# Altium PCB P-TK-05-2FC-A-MB(V1.1)-20171225.PcbDoc (part 3 of 3)
Units mm, origin at the board's own origin, x right, y up, seen from the top; angles counter-clockwise.
Board outline 82.48 x 84.99 mm, 2 copper layers (Top Layer, Bottom Layer); 89 components, 88 nets, 340 pads, 147 vias.
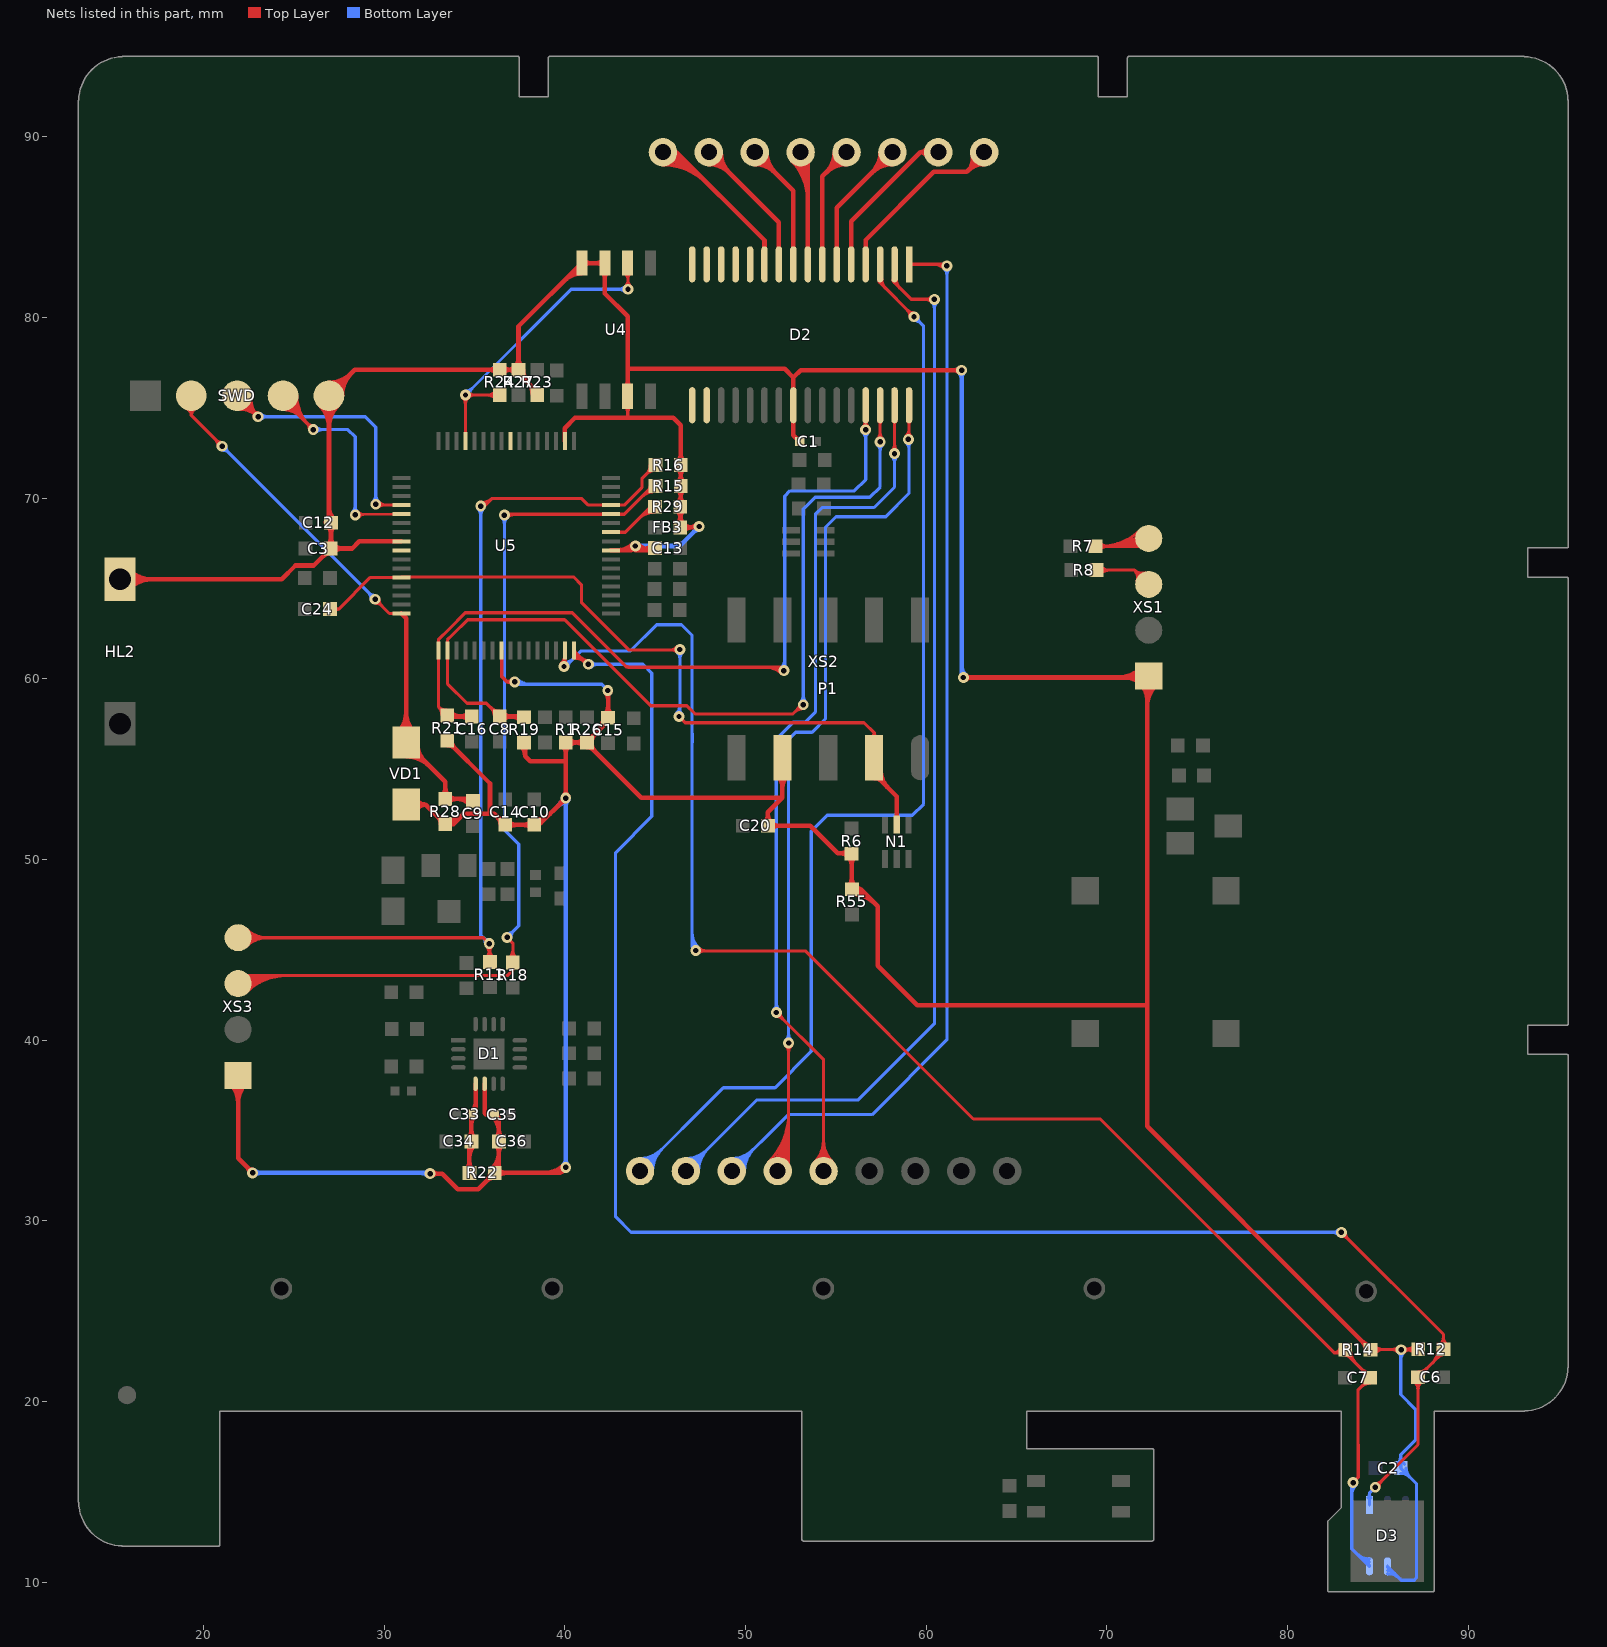
[diagram p3: the nets of this part, all layers, seen from the top]

## Via types
v1: diameter 0.6, hole 0.3, Top Layer to Bottom Layer, tented both sides, 146 vias
v2: diameter 0.5, hole 0.3, Top Layer to Bottom Layer, tented both sides, 1 vias

## Nets (pads, with @x,y where several pads share a name; then routed paths per layer and width w, separated by ;. In a path a pad name is that pad's centre, name@x,y a point inside that pad or via, vN(x,y) a via of type N, cw(c..) or ccw(c..) an arc to the next point about the centre after c; other vN are vias at no path point) (continued)
PLCTXD: C24.1 N1.5 P1.3 U5.60 | length 48.4
  Top Layer w0.178: C24.1@27,63.856 27.486,63.856 ; C24.1@27.258,63.719 cw(c27.486,63.598) 27.486,63.856 ; C24.1@27.258,63.992 ccw(c27.486,64.113) 27.486,63.856 ; U5.60@30.954,65.611 29.241,65.611 27.486,63.856 ; U5.60@30.954,65.631 40.499,65.631 40.923,65.207 40.923,64.225 43.559,61.59 46.34,61.59 v1(46.37,61.62) ; 45.788,61.59 ccw(c45.788,62.202) v1@46.221,61.769 ; 45.932,61.59 cw(c45.932,61.182) v1@46.221,61.471 ; v1(46.32,57.91) 46.66,57.57 56.56,57.57 57.123,57.007 ; P1.3@56.961,56.761 ccw(c56.855,57.007) 57.123,57.007 ; P1.3@57.123,55.633 57.123,57.007 ; P1.3@57.285,56.761 cw(c57.391,57.007) 57.123,57.007
  Top Layer w0.254: P1.3@57.123,54.51 cw(c57.123,53.963) 57.51,54.35 ; P1.3@57.123,55.633 57.123,54.737 58.378,53.482 N1.5@58.378,51.929 ; P1.3@57.242,54.883 ccw(c57.882,54.883) P1.3@57.43,54.43 ; P1.3@57.496,54.883 ccw(c58.75,54.883) 57.863,53.997
  Bottom Layer w0.178: v1@46.171,58.059 ccw(c45.69,58.54) 46.37,58.54 ; v1@46.221,61.471 cw(c45.86,61.11) 46.37,61.11 cw(c46.88,61.11) v1@46.519,61.471 ; v1(46.32,57.91) 46.37,57.96 v1(46.37,61.62) ; 46.37,58.299 ccw(c46.709,58.299) v1@46.469,58.059
RESET: C9.2 R28.2 SWD.2 U5.64 VD1.A | length 44.3
  Top Layer w0.178: SWD.2@19.066,74.953 cw(c18.926,74.574) 19.329,74.574 ; SWD.2@19.329,75.667 19.329,74.574 ; SWD.2@19.593,74.953 ccw(c19.733,74.574) 19.329,74.574 ; v1@20.822,72.871 ccw(c20.312,72.871) 20.672,73.231 ccw(c21.033,73.592) v1@21.033,73.082 ; v1(21.033,72.871) 19.329,74.574 ; v1@29.5,64.192 cw(c29.5,63.682) 29.861,64.043 cw(c30.221,64.403) v1@29.711,64.403 ; v1(29.5,64.403) 30.293,63.611 U5.64@30.954,63.611 ; C9.2@34.802,53.353 34.918,53.353 C9.2@34.918,53.236
  Top Layer w0.254: VD1.A@30.768,57.04 ccw(c29.684,58.124) 31.217,58.124 ccw(c32.75,58.124) VD1.A@31.666,57.04 ; VD1.A@30.947,56.861 ccw(c30.297,57.511) 31.217,57.511 ccw(c32.136,57.511) VD1.A@31.486,56.861 ; U5.64@30.954,63.611 31.217,63.348 VD1.A@31.217,56.464 33.391,54.29 R28.2@33.391,53.353 C9.2@34.802,53.353 ; VD1.A@31.217,55.702 cw(c31.217,53.863) 32.517,55.163 ; VD1.A@31.217,55.956 cw(c31.217,54.73) 32.084,55.597 ; VD1.A@31.852,56.337 ccw(c33.078,56.337) 32.211,55.47 ; R28.2@33.211,53.532 ccw(c32.778,53.966) 33.391,53.966 ccw(c34.004,53.966) 33.57,53.532 ccw(c34.004,53.966) 34.004,53.353 ccw(c34.004,52.74) R28.2@33.57,53.173 ; 34.024,53.353 cw(c34.024,52.343) C9.2@34.739,53.057
  Bottom Layer w0.178: v1@21.033,72.66 cw(c21.033,72.15) 21.393,72.51 cw(c21.753,72.871) v1@21.244,72.871 ; v1(21.033,72.871) v1(29.5,64.403) ; v1@29.289,64.403 ccw(c28.78,64.403) 29.14,64.764 ccw(c29.5,65.124) v1@29.5,64.614
SCK: R24.2 U4.6 U5.45 | length 23.3
  Top Layer w0.178: v1@34.355,75.555 cw(c33.994,75.195) 34.504,75.195 cw(c35.013,75.195) 34.653,75.555 cw(c35.013,75.195) 35.013,75.705 cw(c35.013,76.214) v1@34.653,75.854 ; U5.45@34.504,73.161 v1(34.504,75.705) R24.2@36.398,75.705 R24.2@36.398,75.818 ; R24.2@36.192,75.498 ccw(c35.693,75) 35.693,75.705 ccw(c35.693,76.41) R24.2@36.192,75.911 ; U4.6@43.332,82.461 cw(c42.927,82.056) 43.5,82.056 ; v1@43.351,81.709 ccw(c42.99,82.07) 43.5,82.07 ccw(c44.01,82.07) v1@43.649,81.709 ; v1(43.5,81.56) U4.6@43.5,82.992 ; 43.5,82.129 cw(c43.969,82.129) U4.6@43.637,82.461
  Bottom Layer w0.178: v1(34.504,75.705) 40.359,81.56 v1(43.5,81.56) ; v1@34.504,75.916 ccw(c34.504,76.425) 34.864,76.065 ccw(c35.225,75.705) v1@34.715,75.705 ; v1@43.351,81.411 ccw(c42.99,81.05) 42.99,81.56 ccw(c42.99,82.07) v1@43.351,81.709
SCL1: C16.2 D2.29 R21.2 U5.1 | length 52.7
  Top Layer w0.178: R21.2@33.199,57.976 ccw(c32.532,57.987) 33.004,58.459 ; R21.2@33.486,58.263 cw(c33.476,58.93) 33.004,58.459 ; R21.2@33.55,57.912 R21.2@33.491,57.971 33.004,58.459 ; 51.172,60.636 cw(c51.172,59.492) v1@51.981,60.301 ; 51.601,60.636 cw(c51.601,59.921) v1@52.106,60.426 ; v1@52.11,60.47 51.944,60.636 44.416,60.636 44.415,60.637 43.945,60.637 43.944,60.636 43.507,60.636 43.483,60.66 43.4,60.66 40.41,63.65 34.49,63.65 33.595,62.755 33.004,62.164 U5.1@33.004,61.561 33.004,58.459 ; v1@56.504,73.933 ccw(c56.144,74.293) 56.653,74.293 ccw(c57.163,74.293) v1@56.803,73.933 ; D2.29@56.589,74.254 cw(c56.433,74.098) 56.653,74.098 cw(c56.873,74.098) D2.29@56.718,74.254 ; v1(56.653,73.783) D2.29@56.653,75.138
  Top Layer w0.254: R21.2@33.55,57.912 C16.2@34.849,57.912 ; R21.2@33.671,57.792 cw(c33.962,57.501) 33.962,57.912 ; R21.2@33.671,58.151 ccw(c34.247,58.727) 34.247,57.912 ; C16.2@34.669,57.732 ccw(c34.236,57.299) 34.236,57.912 ccw(c34.236,58.525) C16.2@34.669,58.092
  Bottom Layer w0.178: v1@51.981,60.599 ccw(c51.524,61.056) 52.17,61.056 ; v1(52.13,60.45) 52.17,60.49 52.17,70.11 52.46,70.4 56.03,70.4 56.653,71.023 v1(56.653,73.783) ; 52.17,60.863 ccw(c52.543,60.863) v1@52.279,60.599 ; v1@56.504,73.634 cw(c56.144,73.274) 56.653,73.274 cw(c57.163,73.274) v1@56.803,73.634
SCL2: C7.1 D3.6 R14.1 U5.15 | length 96.1
  Top Layer w0.178: v1@39.806,60.83 ccw(c39.33,61.306) U5.15@40.004,61.306 ; v1(39.956,60.68) 40.004,60.728 U5.15@40.004,61.561 ; U5.15@40.004,61.074 ccw(c40.349,61.074) v1@40.105,60.83 ; v1(47.25,44.96) 47.27,44.94 53.31,44.94 62.614,35.636 69.643,35.636 82.584,22.695 ; v1@47.399,44.811 cw(c47.711,44.499) 47.711,44.94 ; v1@47.399,45.109 ccw(c47.808,45.518) 47.808,44.94 ; R14.1@82.823,22.695 ccw(c82.823,22.972) R14.1@83.088,22.893 ; R14.1@82.918,22.943 cw(c82.584,23.043) 82.584,22.695 ; R14.1@83.198,22.568 cw(c83.198,22.261) 83.415,22.478 ; R14.1@83.198,22.86 R14.1@83.198,22.695 ; R14.1@83.312,22.86 ccw(c83.986,22.86) 83.509,22.383 ; R14.1@83.49,22.86 ccw(c84.593,22.86) 83.813,22.08 ; v1@83.562,15.462 v1(83.63,15.51) 83.92,15.8 83.92,17.615 83.895,17.64 83.895,20.623 C7.1@84.582,21.311 R14.1@83.198,22.695 ; C7.1@84.582,21.018 ccw(c84.582,20.313) 84.083,20.812 ccw(c83.585,21.311) 84.29,21.311 ccw(c83.585,21.311) 84.083,21.809 ccw(c84.582,22.308) C7.1@84.582,21.603 ; 82.584,22.695 R14.1@83.198,22.695
  Bottom Layer w0.178: v1(39.956,60.68) 40.079,60.68 40.227,60.828 40.227,60.864 40.903,61.54 43.64,61.54 45.09,62.99 46.46,62.99 47.042,62.408 47.042,56.961 47.05,56.953 47.05,56.483 47.047,56.48 47.047,56.405 47.042,56.401 47.042,45.168 v1(47.25,44.96) ; v1@39.956,60.891 ccw(c39.956,61.613) 40.466,61.103 ; v1@40.167,60.68 cw(c40.465,60.68) 40.254,60.891 ; 47.042,45.542 ccw(c47.832,45.542) v1@47.274,44.984 ; 47.042,45.971 ccw(c48.261,45.971) v1@47.399,45.109 ; v1@83.481,15.361 cw(c83.285,15.165) 83.562,15.165 ; 83.562,14.836 cw(c84.304,14.836) v1@83.779,15.361 ; v1@83.562,15.462 83.562,11.85 D3.6@84.534,10.878 ; 83.832,11.579 ccw(c84.534,12.281) D3.6@84.534,11.289 ; 84.136,11.276 ccw(c84.534,11.674) D3.6@84.534,11.111 ; D3.6@84.439,10.972 ccw(c84.534,11.067) D3.6@84.534,10.933
SCL3: R11.2 R16.2 U5.29 XS3.4 | length 60.7
  Top Layer w0.178: XS3.4@21.922,45.67 35.49,45.67 v1(35.82,45.34) 35.82,44.357 R11.2@35.858,44.319 ; XS3.4@22.263,45.328 cw(c23.089,44.503) 23.089,45.67 cw(c23.089,46.837) XS3.4@22.263,46.012 ; XS3.4@22.389,45.203 cw(c23.518,44.074) 23.518,45.67 cw(c23.518,47.266) XS3.4@22.389,46.137 ; v1@35.35,69.61 v1(35.35,69.56) 35.552,69.56 35.962,69.97 ; v1@35.354,69.593 ccw(c35.407,70.012) 35.705,69.713 ; v1@35.376,69.769 ccw(c35.464,70.468) 35.962,69.97 ; R11.2@35.652,44.525 ccw(c35.246,44.931) 35.82,44.931 ; v1@35.671,45.191 cw(c35.31,44.83) 35.82,44.83 cw(c36.33,44.83) v1@35.969,45.191 ; v1@35.82,45.117 ccw(c36.656,45.117) R11.2@36.065,44.525 ; R16.2@44.729,71.831 cw(c44.024,71.831) 44.523,71.333 cw(c45.022,70.834) R16.2@45.022,71.539 ; R16.2@45.022,71.831 44.27,71.08 44.27,70.583 43.298,69.611 U5.29@42.554,69.611 41.309,69.611 40.95,69.97 35.962,69.97
  Bottom Layer w0.178: v1@35.201,69.411 cw(c34.84,69.05) 35.35,69.05 cw(c35.86,69.05) v1@35.499,69.411 ; v1(35.35,69.56) 35.35,45.81 v1(35.82,45.34) ; v1@35.609,45.34 ccw(c35.099,45.34) 35.46,45.7 ccw(c35.82,46.061) v1@35.82,45.551
SDA1: C8.2 D2.30 R19.2 U5.2 | length 56.6
  Top Layer w0.178: C8.2@36.106,57.912 ccw(c35.401,57.912) 35.9,58.411 ccw(c36.398,58.909) C8.2@36.398,58.204 ; C8.2@36.398,57.912 35.66,58.65 34.59,58.65 33.504,59.736 U5.2@33.504,61.561 33.504,62.15 33.804,62.45 34.624,63.27 39.99,63.27 44.751,58.509 46.761,58.509 47.22,58.05 52.617,58.05 v1@53.127,58.56 ; 52.714,58.148 cw(c53.2,57.662) v1@53.2,58.349 ; 52.892,58.325 ccw(c52.657,58.56) v1@52.989,58.56 ; v1@57.304,73.263 ccw(c56.944,73.623) 57.453,73.623 ccw(c57.963,73.623) v1@57.603,73.263 ; D2.30@57.389,74.254 cw(c57.233,74.098) 57.453,74.098 cw(c57.673,74.098) D2.30@57.518,74.254 ; v1(57.453,73.113) D2.30@57.453,75.138
  Top Layer w0.254: C8.2@36.398,57.912 37.706,57.912 R19.2@37.744,57.874 ; C8.2@36.578,57.732 cw(c37.011,57.299) 37.011,57.912 cw(c37.011,58.525) C8.2@36.578,58.092 ; 37.039,57.912 cw(c37.039,57.169) R19.2@37.565,57.694 ; 37.223,57.912 ccw(c37.223,58.395) R19.2@37.565,58.054
  Bottom Layer w0.178: v1@53.051,58.709 ccw(c52.69,59.07) 53.2,59.07 ccw(c53.71,59.07) v1@53.349,58.709 ; v1(53.2,58.56) 53.2,69.38 53.864,70.044 56.888,70.044 57.453,70.61 v1(57.453,73.113) ; v1@57.304,72.964 cw(c56.944,72.604) 57.453,72.604 cw(c57.963,72.604) v1@57.603,72.964
SDA2: C6.2 D3.1 R12.1 U5.16 | length 106.1
  Top Layer w0.178: U5.16@40.504,61.15 cw(c40.504,60.157) v1@41.206,60.859 ; U5.16@40.504,61.328 cw(c40.504,60.764) 40.902,61.163 ; U5.16@40.504,61.505 cw(c40.504,61.371) U5.16@40.599,61.466 ; U5.16@40.504,61.561 41.265,60.8 v1(41.31,60.8) ; 40.872,61.192 ccw(c41.31,61.63) v1@41.31,61.011 ; 40.982,61.083 cw(c40.699,60.8) v1@41.099,60.8 ; v1@82.983,29.151 cw(c82.983,28.641) 83.344,29.002 cw(c83.704,29.362) v1@83.194,29.362 ; v1(82.983,29.362) 88.633,23.712 R12.1@88.633,22.885 88.633,22.746 C6.2@87.224,21.336 87.224,17.614 v1(84.86,15.25) ; v1@84.86,15.461 ccw(c84.86,15.971) 85.22,15.61 ccw(c85.581,15.25) v1@85.071,15.25 ; C6.2@87.017,21.129 cw(c86.518,20.631) 87.224,20.631 cw(c87.929,20.631) C6.2@87.43,21.129 ; C6.2@87.224,21.628 ccw(c87.224,22.333) 87.722,21.835 ccw(c88.221,21.336) C6.2@87.516,21.336 ; 88.036,22.148 ccw(c87.299,22.885) R12.1@88.341,22.885 ; 88.339,22.452 ccw(c87.906,22.885) R12.1@88.519,22.885 ; 88.373,22.485 cw(c88.633,22.225) R12.1@88.633,22.593 ; R12.1@88.427,23.092 ccw(c87.928,23.591) 88.633,23.591 ccw(c89.339,23.591) R12.1@88.84,23.092
  Bottom Layer w0.178: v1(41.31,60.8) 44.33,60.8 44.813,60.317 44.813,52.38 42.81,50.377 42.81,30.216 43.664,29.362 v1(82.983,29.362) ; v1@41.459,60.651 cw(c41.82,60.29) 41.82,60.8 cw(c41.82,61.31) v1@41.459,60.949 ; v1@82.834,29.213 ccw(c82.474,28.853) 82.474,29.362 ccw(c82.474,29.872) v1@82.834,29.511 ; D3.1@84.455,14.66 ccw(c84.266,14.849) 84.534,14.849 ccw(c84.802,14.849) D3.1@84.613,14.66 ; D3.1@84.534,14.281 84.534,14.924 v1(84.86,15.25)
SDA3: R15.2 R18.1 U5.28 XS3.3 | length 64.8
  Top Layer w0.178: XS3.3@21.886,43.165 cw(c22.863,42.189) 22.863,43.57 ; XS3.3@21.922,43.13 22.362,43.57 36.82,43.57 37.127,43.877 ; XS3.3@22.012,43.04 cw(c23.292,41.759) 23.292,43.57 ; XS3.3@22.138,42.914 cw(c23.722,41.33) 23.722,43.57 ; XS3.3@22.263,42.788 cw(c24.151,40.901) 24.151,43.57 ; XS3.3@22.389,42.663 cw(c24.58,40.472) 24.58,43.57 ; v1(36.66,69.06) 36.66,69.081 36.689,69.111 U5.28@42.554,69.111 43.301,69.111 44.853,70.663 R15.2@45.022,70.663 ; v1@36.809,68.911 cw(c37.292,68.427) 37.292,69.111 ; v1@36.809,69.209 ccw(c37.047,69.447) 37.047,69.111 ; v1(36.81,45.69) 37.127,45.373 R18.1@37.127,44.301 37.127,43.877 ; R18.1@36.92,44.507 ccw(c36.422,45.006) 37.127,45.006 ccw(c37.832,45.006) R18.1@37.333,44.507 ; R18.1@37.023,44.028 cw(c36.965,43.877) 37.127,43.877 ; R18.1@37.231,44.028 ccw(c37.288,43.877) 37.127,43.877 ; 44.235,70.045 cw(c45.022,69.258) R15.2@45.022,70.371 ; 44.538,70.348 cw(c45.022,69.865) R15.2@45.022,70.549 ; R15.2@44.642,70.452 ccw(c44.431,70.663) R15.2@44.729,70.663
  Bottom Layer w0.178: v1@36.511,68.911 cw(c36.15,68.55) 36.66,68.55 cw(c37.17,68.55) v1@36.809,68.911 ; v1(36.66,69.06) 36.66,51.635 37.45,50.845 37.45,46.33 v1(36.81,45.69) ; v1@36.81,45.901 ccw(c36.81,46.411) 37.17,46.05 ccw(c37.531,45.69) v1@37.021,45.69
SEG00: D2.31 XS2.5 | length 57.7
  Top Layer w0.178: v1@51.71,41.319 cw(c51.71,40.809) 52.07,41.17 cw(c52.431,41.53) v1@51.921,41.53 ; v1(51.71,41.53) 54.324,38.916 XS2.5@54.324,32.756 ; XS2.5@53.831,33.25 ccw(c52.638,34.442) 54.324,34.442 ccw(c56.011,34.442) XS2.5@54.818,33.25 ; XS2.5@53.956,33.124 ccw(c53.067,34.013) 54.324,34.013 ccw(c55.581,34.013) XS2.5@54.693,33.124 ; XS2.5@54.082,32.999 ccw(c53.497,33.584) 54.324,33.584 ccw(c55.152,33.584) XS2.5@54.567,32.999 ; v1@58.101,72.609 ccw(c57.732,72.978) 58.253,72.978 ; D2.31@58.189,74.254 cw(c58.033,74.098) 58.253,74.098 cw(c58.473,74.098) D2.31@58.318,74.254 ; v1(58.25,72.46) 58.253,72.463 D2.31@58.253,75.138 ; 58.253,72.961 ccw(c58.751,72.961) v1@58.399,72.609
  Bottom Layer w0.178: v1@51.561,41.679 ccw(c51.2,42.04) 51.71,42.04 ccw(c52.22,42.04) v1@51.859,41.679 ; v1(51.71,41.53) 51.71,56.655 52.644,57.589 53.304,57.589 53.87,58.154 53.87,69.11 54.24,69.48 57.12,69.48 58.25,70.61 v1(58.25,72.46) ; v1@58.101,72.311 cw(c57.74,71.95) 58.25,71.95 cw(c58.76,71.95) v1@58.399,72.311
SEG01: D2.32 XS2.6 | length 64.7
  Top Layer w0.178: XS2.6@51.291,33.25 ccw(c48.636,35.904) 52.39,35.904 ; XS2.6@51.416,33.124 ccw(c49.065,35.475) 52.39,35.475 ; XS2.6@51.542,32.999 ccw(c49.495,35.046) 52.39,35.046 ; XS2.6@51.668,32.873 ccw(c49.924,34.617) 52.39,34.617 ; XS2.6@51.784,32.756 52.39,33.362 v1(52.39,39.84) ; XS2.6@51.793,32.747 ccw(c50.353,34.187) 52.39,34.187 ; XS2.6@51.919,32.621 ccw(c50.782,33.758) 52.39,33.758 ; XS2.6@52.045,32.496 ccw(c51.212,33.329) 52.39,33.329 ; v1@52.241,39.691 cw(c51.88,39.33) 52.39,39.33 cw(c52.9,39.33) v1@52.539,39.691 ; v1@58.871,73.399 ccw(c58.429,73.84) 59.053,73.84 ; D2.32@58.989,74.254 cw(c58.833,74.098) 59.053,74.098 cw(c59.273,74.098) D2.32@59.118,74.254 ; v1(59.02,73.25) 59.05,73.25 59.053,73.253 D2.32@59.053,75.138 ; 59.053,73.679 ccw(c59.449,73.679) v1@59.169,73.399
  Bottom Layer w0.178: v1@52.241,39.989 ccw(c51.88,40.35) 52.39,40.35 ccw(c52.9,40.35) v1@52.539,39.989 ; v1(52.39,39.84) 52.39,56.65 52.78,57.04 53.69,57.04 54.43,57.78 54.43,68.39 55.01,68.97 57.76,68.97 59.053,70.263 59.053,73.253 59.05,73.25 v1(59.02,73.25) ; v1@58.871,73.101 cw(c58.429,72.659) 59.053,72.659 ; 59.053,72.821 cw(c59.449,72.821) v1@59.169,73.101
SEG02: D2.1 XS2.7 | length 68
  Top Layer w0.178: D2.1@59.053,82.938 61.062,82.938 v1(61.15,82.85) ; D2.1@59.118,82.874 cw(c59.273,82.718) 59.273,82.938 cw(c59.273,83.158) D2.1@59.118,83.003 ; 60.427,82.938 cw(c60.427,82.127) v1@61.001,82.701 ; 60.854,82.938 ccw(c60.854,83.146) v1@61.001,82.999 ; 60.856,82.938 cw(c60.856,82.556) v1@61.126,82.826
  Bottom Layer w0.178: XS2.7@49.244,32.756 52.368,35.88 57.01,35.88 61.15,40.02 v1(61.15,82.85) ; XS2.7@49.244,33.099 ccw(c49.244,33.927) 49.83,33.341 ccw(c50.415,32.756) XS2.7@49.587,32.756 ; XS2.7@49.244,33.277 ccw(c49.244,34.534) 50.133,33.645 ccw(c51.022,32.756) XS2.7@49.765,32.756 ; XS2.7@49.244,33.455 ccw(c49.244,35.141) 50.437,33.949 ccw(c51.629,32.756) XS2.7@49.943,32.756 ; v1@61.001,82.701 cw(c60.64,82.34) 61.15,82.34 cw(c61.66,82.34) v1@61.299,82.701
SEG03: D2.2 XS2.8 | length 69.7
  Top Layer w0.178: D2.2@58.167,82.118 ccw(c58.444,82.118) 58.248,81.922 ; D2.2@58.253,82.938 58.253,81.917 ; D2.2@58.344,82.118 ccw(c59.051,82.118) 58.552,81.618 ; v1@60.311,80.851 ccw(c59.95,80.49) 59.95,81 ccw(c59.95,81.51) v1@60.311,81.149 ; v1(60.46,81) 59.17,81 58.253,81.917 ; 58.253,81.917 ccw(c58.076,81.917) 58.193,82.05 cw(c58.076,81.917) 58.253,81.917 ; 58.253,81.917 cw(c58.431,81.917) 58.314,82.05 ccw(c58.431,81.917) 58.253,81.917
  Bottom Layer w0.178: XS2.8@46.704,32.756 50.638,36.69 56.24,36.69 60.46,40.91 v1(60.46,81) ; XS2.8@46.704,33.099 ccw(c46.704,33.927) 47.29,33.341 ccw(c47.875,32.756) XS2.8@47.047,32.756 ; XS2.8@46.704,33.277 ccw(c46.704,34.534) 47.593,33.645 ccw(c48.482,32.756) XS2.8@47.225,32.756 ; XS2.8@46.704,33.455 ccw(c46.704,35.141) 47.897,33.949 ccw(c49.089,32.756) XS2.8@47.403,32.756 ; v1@60.311,80.851 cw(c59.95,80.49) 60.46,80.49 cw(c60.97,80.49) v1@60.609,80.851
SEG04: D2.3 XS2.9 | length 71
  Top Layer w0.178: D2.3@57.367,82.118 ccw(c57.644,82.118) 57.448,81.922 ; D2.3@57.453,82.938 57.453,81.917 ; D2.3@57.544,82.118 ccw(c58.251,82.118) 57.752,81.618 ; v1@59.119,80.04 ccw(c58.609,80.04) 58.97,80.4 ccw(c59.33,80.761) v1@59.33,80.251 ; v1(59.33,80.04) 57.453,81.917 ; 57.453,81.917 ccw(c57.276,81.917) 57.393,82.05 cw(c57.276,81.917) 57.453,81.917 ; 57.453,81.917 cw(c57.631,81.917) 57.514,82.05 ccw(c57.631,81.917) 57.453,81.917
  Bottom Layer w0.178: XS2.9@44.164,32.756 48.778,37.37 51.64,37.37 53.645,39.375 53.645,51.566 54.525,52.445 59.24,52.445 59.86,53.065 59.86,79.51 v1(59.33,80.04) ; XS2.9@44.164,33.099 ccw(c44.164,33.927) 44.75,33.341 ccw(c45.335,32.756) XS2.9@44.507,32.756 ; XS2.9@44.164,33.277 ccw(c44.164,34.534) 45.053,33.645 ccw(c45.942,32.756) XS2.9@44.685,32.756 ; XS2.9@44.164,33.455 ccw(c44.164,35.141) 45.357,33.949 ccw(c46.549,32.756) XS2.9@44.863,32.756 ; v1@59.33,79.829 cw(c59.33,79.319) 59.69,79.68 cw(c60.051,80.04) v1@59.541,80.04
SEG05: D2.4 XS2.10 | length 12.6
  Top Layer w0.254: D2.4@56.653,82.938 56.653,84.283 60.422,88.052 62.252,88.052 63.214,89.014 XS2.10@63.214,89.144 ; 62.317,88.117 ccw(c61.647,88.787) XS2.10@62.571,88.997 ; 62.317,88.117 cw(c63.203,87.231) XS2.10@63.21,88.484 ; 62.642,88.442 ccw(c62.176,88.907) XS2.10@62.818,89.054
SEG06: D2.5 XS2.11 | length 9.8
  Top Layer w0.254: D2.5@55.853,82.938 55.853,85.318 59.679,89.144 ; XS2.11@60.066,88.887 ccw(c59.679,88.724) 59.679,89.144 ; XS2.11@60.066,89.401 cw(c59.679,89.564) 59.679,89.144 ; XS2.11@60.674,89.144 59.679,89.144
SEG07: D2.6 XS2.12 | length 11.5
  Top Layer w0.254: D2.6@55.053,82.938 55.053,86.063 XS2.12@58.134,89.144 ; XS2.12@57.474,89.144 cw(c55.88,89.144) 57.007,88.017 cw(c58.134,86.889) XS2.12@58.134,88.484 ; XS2.12@57.728,89.144 cw(c56.747,89.144) 57.441,88.45 cw(c58.134,87.757) XS2.12@58.134,88.738
SEG08: D2.7 XS2.13 | length 10.8
  Top Layer w0.254: D2.7@54.253,82.938 54.253,87.803 XS2.13@55.594,89.144 ; XS2.13@54.934,89.144 cw(c53.34,89.144) 54.467,88.017 cw(c55.594,86.889) XS2.13@55.594,88.484 ; XS2.13@55.188,89.144 cw(c54.207,89.144) 54.901,88.45 cw(c55.594,87.757) XS2.13@55.594,88.738
SEG09: D2.8 XS2.14 | length 12.8
  Top Layer w0.254: XS2.14@52.587,88.677 cw(c50.497,86.587) 53.453,86.587 ; XS2.14@52.767,88.857 cw(c51.11,87.2) 53.453,87.2 ; XS2.14@52.947,89.036 cw(c51.723,87.813) 53.453,87.813 ; XS2.14@53.054,89.144 53.453,88.745 D2.8@53.453,82.938 ; XS2.14@53.126,89.216 cw(c52.336,88.426) 53.453,88.426
SEG10: D2.9 XS2.15 | length 11.1
  Top Layer w0.254: XS2.15@50.514,88.484 cw(c50.514,86.889) 51.642,88.017 cw(c52.769,89.144) XS2.15@51.175,89.144 ; XS2.15@50.514,88.738 cw(c50.514,87.757) 51.208,88.45 cw(c51.902,89.144) XS2.15@50.921,89.144 ; XS2.15@50.514,89.144 52.653,87.005 D2.9@52.653,82.938
SEG11: D2.10 XS2.16 | length 11.9
  Top Layer w0.254: XS2.16@47.974,88.484 cw(c47.974,86.889) 49.102,88.017 cw(c50.229,89.144) XS2.16@48.635,89.144 ; XS2.16@47.974,88.738 cw(c47.974,87.757) 48.668,88.45 cw(c49.362,89.144) XS2.16@48.381,89.144 ; XS2.16@47.974,89.144 51.853,85.265 D2.10@51.853,82.938
SEG12: D2.11 XS2.17 | length 16.7
  Top Layer w0.254: XS2.17@45.434,88.484 cw(c45.434,85.099) 47.828,87.492 ; XS2.17@45.434,88.738 cw(c45.434,85.966) 47.394,87.926 ; XS2.17@45.434,88.992 cw(c45.434,86.834) 46.96,88.36 ; XS2.17@45.434,89.144 46.176,89.144 51.053,84.267 D2.11@51.053,82.938 ; XS2.17@45.434,89.246 cw(c45.434,87.701) 46.527,88.793
SEG13: D2.12
SEG14: D2.13
SEG15: D2.14
SEG16: D2.15
SEG17: D2.16
SEG18: D2.17
SEG19: D2.18
SWCLK: SWD.3 U5.52 | length 22.7
  Top Layer w0.178: SWD.3@21.869,75.667 v1(23.03,74.506) ; SWD.3@21.903,75.263 cw(c21.964,74.525) 22.488,75.048 cw(c23.011,75.572) SWD.3@22.274,75.633 ; SWD.3@21.918,75.085 cw(c22.006,74.024) 22.759,74.777 cw(c23.512,75.53) SWD.3@22.451,75.618 ; SWD.3@21.933,74.908 cw(c22.048,73.524) v1(23.03,74.506) ; SWD.3@22.628,75.603 ccw(c24.012,75.488) v1(23.03,74.506) ; v1@22.819,74.506 ccw(c22.309,74.506) 22.67,74.866 ccw(c23.03,75.227) v1@23.03,74.717 ; v1@29.671,69.611 U5.52@30.954,69.611 ; v1@29.689,69.511 cw(c29.931,69.269) 29.931,69.611 ; v1@29.689,69.809 ccw(c30.168,70.288) 30.168,69.611
  Bottom Layer w0.178: v1(23.03,74.506) 28.964,74.506 29.54,73.93 v1(29.54,69.66) ; v1@23.179,74.357 cw(c23.54,73.996) 23.54,74.506 cw(c23.54,75.016) v1@23.179,74.655 ; v1@29.391,69.809 ccw(c29.03,70.17) 29.54,70.17 ccw(c30.05,70.17) v1@29.689,69.809
SWDIO: SWD.4 U5.53 | length 22.8
  Top Layer w0.127: v1(28.4,69.07) 28.441,69.111 U5.53@30.954,69.111 ; v1@28.477,68.993 cw(c28.763,68.707) 28.763,69.111 ; v1@28.567,68.903 cw(c29.069,68.401) 29.069,69.111 ; v1@28.567,69.237 ccw(c28.873,69.543) 28.873,69.111 ; U5.53@30.531,69.078 ccw(c30.452,68.999) 30.452,69.111 ccw(c30.452,69.223) U5.53@30.531,69.144
  Top Layer w0.178: SWD.4@24.409,74.906 cw(c24.409,73.566) 25.357,74.513 ; SWD.4@24.409,75.083 cw(c24.409,74.173) 25.053,74.817 ; SWD.4@24.409,75.667 24.409,75.461 v1(26.08,73.79) ; SWD.4@24.637,75.667 ccw(c25.684,75.667) 24.944,74.926 ; SWD.4@24.815,75.667 ccw(c26.291,75.667) 25.247,74.623 ; SWD.4@24.993,75.667 ccw(c26.898,75.667) 25.551,74.319 ; SWD.4@25.171,75.667 ccw(c27.505,75.667) 25.854,74.016 ; v1@25.869,73.79 ccw(c25.359,73.79) 25.72,74.15 ccw(c26.08,74.511) v1@26.08,74.001
  Bottom Layer w0.178: v1(26.08,73.79) 28,73.79 28.4,73.39 v1(28.4,69.07) ; v1@26.229,73.641 cw(c26.59,73.28) 26.59,73.79 cw(c26.59,74.3) v1@26.229,73.939 ; v1@28.251,69.219 ccw(c27.89,69.58) 28.4,69.58 ccw(c28.91,69.58) v1@28.549,69.219
USART2_RX: R7.2 XS1.4 | length 12.9
  Top Layer w0.178: R7.2@69.38,67.335 71.891,67.335 XS1.4@72.322,67.766 ; R7.2@69.587,67.129 cw(c70.085,66.63) 70.085,67.335 cw(c70.085,68.041) R7.2@69.587,67.542 ; R7.2@69.686,67.335 ccw(c69.686,70.401) XS1.4@71.854,68.233 ; 70.116,67.335 ccw(c70.116,69.972) XS1.4@71.98,68.108 ; 70.545,67.335 ccw(c70.545,69.543) XS1.4@72.106,67.982 ; 70.974,67.335 ccw(c70.974,69.113) XS1.4@72.231,67.856 ; 71.403,67.335 ccw(c71.403,68.684) XS1.4@72.357,67.73
USART2_TX: R8.1 XS1.3 | length 6.6
  Top Layer w0.178: R8.1@69.431,66.015 71.533,66.015 ; R8.1@69.637,65.808 cw(c70.136,65.309) 70.136,66.015 cw(c70.136,66.72) R8.1@69.637,66.221 ; XS1.3@71.687,65.412 ccw(c71.101,65.583) 71.533,66.015 ; XS1.3@71.858,65.362 ccw(c71.43,65.487) 71.745,65.802 ccw(c72.061,66.118) XS1.3@72.186,65.69 ; XS1.3@72.136,65.86 cw(c71.964,66.446) 71.533,66.015 ; XS1.3@72.322,65.226 71.533,66.015
VBUS_T: R29.2 U5.26 | length 4.7
  Top Layer w0.178: U5.26@42.554,68.111 43.351,68.111 44.76,69.52 R29.2@44.996,69.52 ; 44.094,68.854 cw(c44.996,67.952) R29.2@44.996,69.228 ; 44.398,69.158 cw(c44.996,68.559) R29.2@44.996,69.406
VDD: C1.2 C2.2 C3.2 C10.1 C12.2 C13.2 C14.2 C15.2 C20.2 C35.2 C36.1 D1.6 D2.24 D3.5 FB3.2 HL2.A P1.7 R1.2 R6.2 R12.2 R14.2 R15.1 R16.1 R19.1 R21.1 R22.1 R23.1 R24.1 R26.1 R27.1 R28.1 R29.1 R55.2 SWD.5 U4.3 U4.7 U4.8 U5.8 U5.24 U5.34 U5.56 VD1.K XS1.1 XS3.1 | length 478
  Top Layer w0.178: C12.2@26.949,68.745 26.949,68.707 26.748,68.707 26.748,68.631 C12.2@27.064,68.631 ; 37.848,76.505 38.481,75.871 38.481,75.856 R23.1@38.481,75.705 R23.1@38.481,75.546 ; 37.865,76.487 cw(c37.082,75.705) R23.1@38.189,75.705 ; 38.168,76.184 cw(c37.689,75.705) R23.1@38.367,75.705 ; 38.266,76.086 ccw(c38.481,76.3) R23.1@38.481,75.997 ; U4.3@43.332,75.095 cw(c42.964,74.726) 43.485,74.726 cw(c44.006,74.726) U4.3@43.637,75.095 ; U4.3@43.332,76.188 ccw(c42.964,76.556) 43.485,76.556 ccw(c44.006,76.556) U4.3@43.637,76.188 ; 43.485,74.472 U4.3@43.485,75.641 43.485,76.579 ; 44.065,77.16 44.071,77.165 46.407,77.165 46.407,77.16 ; C13.2@44.873,67.111 44.996,67.111 C13.2@44.996,67.234 ; R29.1@46.187,69.726 ccw(c45.654,70.259) 46.407,70.259 ; R15.1@46.212,70.456 cw(c45.74,69.985) 46.407,69.985 ; R15.1@46.212,70.869 ccw(c45.74,71.341) 46.407,71.341 ; R16.1@46.212,71.625 cw(c45.74,71.153) 46.407,71.153 ; R16.1@46.212,72.038 ccw(c45.74,72.509) 46.407,72.509 ; 46.407,69.931 cw(c47.151,69.931) R15.1@46.625,70.456 ; 46.407,70.191 ccw(c47.064,70.191) R29.1@46.6,69.726 ; 46.407,71.099 cw(c47.151,71.099) R16.1@46.625,71.625 ; 46.407,71.395 ccw(c47.151,71.395) R15.1@46.625,70.869 ; 46.407,72.563 ccw(c47.151,72.563) R16.1@46.625,72.038 ; 46.407,74.043 46.407,69.459 R29.1@46.419,69.448 ; XS1.1@71.854,59.678 cw(c70.925,58.749) 72.239,58.749 ; XS1.1@71.98,59.804 cw(c71.354,59.178) 72.239,59.178 ; 72.239,36.093 72.239,41.93 72.239,60.045 XS1.1@72.331,60.137 ; 72.239,58.351 cw(c74.117,58.351) XS1.1@72.789,59.678 ; 72.239,58.78 cw(c73.687,58.78) XS1.1@72.663,59.804 ; 72.239,59.209 cw(c73.258,59.209) XS1.1@72.538,59.93 ; R14.2@84.595,22.86 84.62,22.885 v1@86.315,22.885 ; R14.2@84.801,22.653 cw(c85.361,22.093) 85.361,22.885 ; R14.2@84.801,23.067 ccw(c85.239,23.504) 85.239,22.885 ; 85.447,22.885 v1@86.315,22.885 ; v1(86.29,22.86) v1@86.315,22.885 ; v1@86.439,22.711 cw(c86.861,22.289) R12.2@86.861,22.885 ; v1@86.439,23.009 ccw(c86.738,23.308) 86.738,22.885 ; R12.2@87.03,22.679 ccw(c86.531,22.18) 86.531,22.885 ccw(c86.531,23.591) R12.2@87.03,23.092 ; R12.2@87.236,22.885 v1@86.315,22.885 ; 85.719,22.885 cw(c85.719,22.289) 86.141,22.711 ccw(c85.719,22.289) 85.719,22.885 ; 85.842,22.885 ccw(c85.842,23.308) 86.141,23.009 cw(c85.842,23.308) 85.842,22.885
  Top Layer w0.2: U5.8@36.504,61.561 36.504,60.126 36.8,59.83 ; v1@37.077,59.701 ccw(c36.8,59.468) 36.8,59.83 ; v1@37.077,59.959 cw(c36.8,60.192) 36.8,59.83 ; v1(37.23,59.83) 36.8,59.83
  Top Layer w0.254: HL2.A@15.385,65.503 24.331,65.503 25.096,66.269 26.111,66.269 C3.2@27.051,67.208 28.228,67.208 28.631,67.611 U5.56@30.954,67.611 ; HL2.A@15.716,65.172 cw(c16.517,64.371) 16.517,65.503 cw(c16.517,66.635) HL2.A@15.716,65.835 ; HL2.A@15.896,64.992 cw(c17.13,63.758) 17.13,65.503 cw(c17.13,67.249) HL2.A@15.896,66.014 ; XS3.1@21.481,37.609 cw(c20.418,36.546) 21.922,36.546 cw(c23.426,36.546) XS3.1@22.362,37.609 ; XS3.1@21.661,37.789 cw(c21.031,37.159) 21.922,37.159 cw(c22.813,37.159) XS3.1@22.183,37.789 ; XS3.1@21.922,38.05 21.922,33.461 v1@22.73,32.653 ; 22.418,32.966 cw(c22.105,32.653) v1@22.547,32.653 ; 22.442,32.941 ccw(c22.72,33.22) v1@22.72,32.826 ; SWD.5@26.438,75.155 cw(c25.204,73.921) 26.949,73.921 cw(c28.695,73.921) SWD.5@27.461,75.155 ; SWD.5@26.618,75.335 cw(c25.817,74.534) 26.949,74.534 cw(c28.082,74.534) SWD.5@27.281,75.335 ; C3.2@26.797,67.208 cw(c26.184,67.208) 26.617,66.775 cw(c27.051,66.341) C3.2@27.051,66.954 ; C3.2@26.871,67.388 ccw(c26.407,67.852) 27.064,67.852 ; C12.2@26.884,68.451 cw(c26.451,68.018) 27.064,68.018 cw(c27.677,68.018) C12.2@27.243,68.451 ; C12.2@26.949,68.745 SWD.5@26.949,75.667 28.385,77.102 R24.1@36.398,77.102 R27.1@37.44,77.102 ; 26.949,69.52 ccw(c27.953,69.52) C12.2@27.243,68.81 ; SWD.5@26.949,76.136 ccw(c26.949,77.268) 27.75,76.467 ccw(c28.551,75.667) SWD.5@27.418,75.667 ; SWD.5@26.949,76.39 ccw(c26.949,78.135) 28.184,76.901 ccw(c29.418,75.667) SWD.5@27.672,75.667 ; C3.2@27.064,67.221 C12.2@27.064,68.631 ; 27.064,67.791 ccw(c27.634,67.791) 27.231,67.388 ccw(c27.664,67.822) 27.664,67.208 ccw(c27.664,66.595) C3.2@27.231,67.029 ; VD1.K@31.217,53.035 32.311,53.035 ; VD1.K@31.768,52.72 cw(c32.311,52.409) 32.311,53.035 ; VD1.K@31.768,53.35 ccw(c32.311,53.661) 32.311,53.035 ; v1(32.55,32.61) 33.224,32.61 34.084,31.75 35.215,31.75 R22.1@36.119,32.653 ; v1@32.672,32.488 cw(c32.967,32.192) 32.967,32.61 cw(c32.967,33.028) v1@32.672,32.732 ; R28.1@33.137,51.956 ccw(c32.524,51.956) 32.957,52.389 ccw(c33.391,52.823) R28.1@33.391,52.21 ; R28.1@33.43,52.207 ccw(c33.608,53.328) 34.411,52.525 ; R21.1@33.491,56.32 cw(c33.491,55.707) 33.925,56.141 cw(c34.358,56.574) R21.1@33.745,56.574 ; R21.1@33.491,56.574 35.86,54.205 35.86,52.525 ; R28.1@33.608,51.824 cw(c33.841,51.683) 33.841,51.956 ; R28.1@33.608,52.087 ccw(c33.841,52.228) 33.841,51.956 ; 34.058,52.173 cw(c33.512,52.719) R28.1@33.391,51.956 ; D1.6@35.562,37.587 35.562,35.958 35.648,35.872 C35.2@36.093,35.872 36.356,35.61 C36.1@36.356,34.396 36.356,32.891 R22.1@36.119,32.653 ; R22.1@35.865,32.653 cw(c35.252,32.653) 35.685,32.22 cw(c36.119,31.786) R22.1@36.119,32.399 ; R22.1@35.939,32.833 ccw(c34.932,33.84) 36.356,33.84 ; C35.2@36.004,35.962 cw(c35.787,36.179) 35.787,35.872 cw(c35.787,35.566) 36.004,35.783 cw(c35.152,34.931) 36.356,34.931 ; C35.2@36.093,35.745 cw(c36.093,35.439) 36.31,35.656 cw(c36.527,35.872) C35.2@36.22,35.872 ; C36.1@36.177,34.217 cw(c35.743,33.783) 36.356,33.783 cw(c36.969,33.783) C36.1@36.536,34.217 ; C36.1@36.177,34.576 ccw(c35.743,35.01) 36.356,35.01 ccw(c36.969,35.01) C36.1@36.536,34.576 ; C35.2@36.183,35.962 cw(c35.766,35.545) 36.356,35.545 ; R24.1@36.219,76.922 ccw(c35.785,76.489) 35.785,77.102 ccw(c35.785,77.715) R24.1@36.219,77.281 ; R22.1@36.298,32.474 cw(c36.732,32.04) 36.732,32.653 cw(c36.732,33.266) R22.1@36.298,32.833 ; 36.356,33.226 cw(c35.546,33.226) R22.1@36.119,32.653 ; C14.2@36.451,51.916 ccw(c35.837,51.916) 36.271,52.35 ccw(c36.705,52.784) C14.2@36.705,52.17 ; R24.1@36.578,76.922 cw(c37.011,76.489) 37.011,77.102 cw(c37.011,77.715) R24.1@36.578,77.281 ; C14.2@36.884,51.737 cw(c37.318,51.303) 37.318,51.916 cw(c37.318,52.53) C14.2@36.884,52.096 ; R27.1@37.26,76.922 ccw(c36.826,76.489) 36.826,77.102 ccw(c36.826,77.715) 37.26,77.281 ccw(c36.826,77.715) 37.44,77.715 ccw(c38.053,77.715) R27.1@37.619,77.281 ; R27.1@37.44,76.95 R27.1@37.44,77.102 ; R19.1@37.567,56.295 cw(c37.001,55.717) 37.81,55.717 ; R27.1@37.694,77.102 ccw(c38.799,77.102) 38.017,76.32 ; R19.1@37.744,56.477 37.81,56.411 37.81,55.72 38.09,55.44 40.056,55.44 ; 37.81,56.022 cw(c38.199,56.022) R19.1@37.924,56.297 ; C10.1@38.125,51.737 ccw(c37.692,51.303) 37.692,51.916 ccw(c37.692,52.53) C10.1@38.125,52.096 ; C10.1@38.305,52.17 ccw(c38.305,53.439) 39.202,52.542 ; R23.1@38.481,75.909 38.481,75.856 37.44,76.898 R27.1@37.44,77.102 ; 38.768,52.108 cw(c38.305,52.572) C10.1@38.305,51.916 ; 38.908,32.653 ccw(c38.908,34.095) v1@39.928,33.076 ; 39.521,32.653 ccw(c39.521,33.482) v1@40.107,32.896 ; R1.2@39.876,56.297 cw(c39.443,55.864) 40.056,55.864 cw(c40.669,55.864) 40.235,56.297 cw(c40.669,55.864) 40.669,56.477 cw(c40.669,57.09) R1.2@40.235,56.657 ; v1@39.883,53.396 cw(c39.465,53.396) 39.76,53.1 cw(c40.056,52.805) v1@40.056,53.223 ; v1@39.933,53.518 ccw(c39.638,53.813) 40.056,53.813 ccw(c40.473,53.813) v1@40.178,53.518 ; 39.969,82.032 cw(c40.945,81.056) U4.8@40.945,82.436 ; U5.34@40.004,73.161 40.004,73.874 40.567,74.437 46.013,74.437 46.419,74.031 R16.1@46.419,71.831 R15.1@46.419,70.663 46.419,68.402 FB3.2@46.393,68.377 ; v1(40.05,32.953) 39.75,32.653 R22.1@36.119,32.653 ; 40.403,82.465 cw(c40.945,81.923) U4.8@40.945,82.69 ; U4.8@40.836,82.899 cw(c40.945,82.79) U4.8@40.945,82.944 ; R26.1@41.045,56.297 ccw(c40.611,55.864) 40.611,56.477 ccw(c40.611,57.09) R26.1@41.045,56.657 ; U4.8@41.071,82.881 cw(c41.374,82.578) 41.374,83.007 cw(c41.374,83.436) U4.8@41.071,83.133 ; R26.1@41.224,56.223 cw(c41.224,55.731) 41.572,56.079 ; R26.1@41.224,56.731 ccw(c41.224,57.344) 41.658,56.911 ccw(c42.091,56.477) 41.478,56.477 ccw(c42.212,56.477) 41.693,55.958 ; 41.815,57.068 ccw(c41.035,57.849) C15.2@42.139,57.849 ; U4.7@42.089,82.488 cw(c41.786,82.184) 42.215,82.184 cw(c42.644,82.184) U4.7@42.341,82.488 ; U4.7@42.089,82.881 ccw(c41.786,82.578) 41.786,83.007 ccw(c41.786,83.436) U4.7@42.089,83.133 ; C15.2@42.213,58.028 ccw(c41.762,58.48) 42.4,58.48 ; v1@42.258,59.228 cw(c41.914,58.884) 42.4,58.884 ; C15.2@42.393,57.849 42.393,57.645 R26.1@41.224,56.477 ; C15.2@42.4,57.856 v1@42.4,59.35 ; 42.4,58.444 ccw(c42.988,58.444) C15.2@42.572,58.028 ; 42.4,58.981 cw(c42.749,58.981) v1@42.502,59.228 ; U5.24@42.554,67.111 43.671,67.111 v1(43.91,67.35) ; U5.24@42.915,67.111 ccw(c42.915,68.345) v1@43.788,67.472 ; U4.3@43.359,76.161 ccw(c43.056,76.464) 43.485,76.464 ccw(c43.914,76.464) U4.3@43.611,76.161 ; U4.3@43.485,75.641 43.485,77.16 ; 43.528,67.111 ccw(c43.528,67.732) v1@43.967,67.293 ; v1@43.851,67.294 ccw(c44.28,67.703) 44.28,67.111 ; v1@43.91,67.111 44.873,67.111 cw(c44.873,68.269) v1@44.035,67.469 ; v1@44.086,67.111 ccw(c44.086,68.144) C13.2@44.817,67.413 ; R29.1@46.214,69.699 ccw(c45.719,70.194) 46.419,70.194 ; R15.1@46.239,70.483 cw(c45.805,70.05) 46.419,70.05 cw(c47.032,70.05) R15.1@46.598,70.483 ; R15.1@46.239,70.842 ccw(c45.805,71.276) 46.419,71.276 ccw(c47.032,71.276) R15.1@46.598,70.842 ; R16.1@46.239,71.652 cw(c45.805,71.218) 46.419,71.218 cw(c47.032,71.218) R16.1@46.598,71.652 ; R16.1@46.239,72.011 ccw(c45.805,72.444) 46.419,72.444 ccw(c47.032,72.444) R16.1@46.598,72.011 ; R29.1@46.393,69.52 FB3.2@46.393,68.377 ; 46.419,68.845 ccw(c45.719,68.845) 46.214,69.34 cw(c45.78,68.907) 46.393,68.907 cw(c47.006,68.907) 46.573,69.34 ccw(c46.945,68.968) 46.419,68.968 ; 46.419,68.929 ccw(c46.945,68.929) FB3.2@46.573,68.556 ; 46.419,69.051 cw(c45.719,69.051) 46.214,68.556 ccw(c45.78,68.99) 46.393,68.99 ccw(c47.006,68.99) FB3.2@46.573,68.556 ; 46.419,70.072 ccw(c46.945,70.072) R29.1@46.573,69.699 ; FB3.2@46.573,68.197 cw(c47.006,67.764) 47.006,68.377 cw(c47.006,68.99) FB3.2@46.573,68.556 ; 46.89,68.377 ccw(c46.89,68.976) v1@47.314,68.552 ; v1@47.383,68.377 FB3.2@46.393,68.377 ; C20.2@51.065,52.046 ccw(c50.631,52.48) 51.245,52.48 ccw(c51.858,52.48) 51.424,52.046 ccw(c51.858,52.48) 51.858,51.867 ccw(c51.858,51.254) C20.2@51.424,51.687 ; P1.7@51.779,54.62 cw(c51.142,53.983) 52.043,53.983 cw(c52.943,53.983) P1.7@52.307,54.62 ; P1.7@52.043,55.633 52.043,53.413 ; C1.2@52.883,73.127 ccw(c52.576,73.127) 52.793,73.343 ccw(c53.01,73.56) C1.2@53.01,73.254 ; C1.2@53.01,73.127 52.653,73.483 D2.24@52.653,75.138 52.653,76.675 ; 55.191,50.35 cw(c55.191,49.639) 55.694,50.142 cw(c55.26,49.708) 55.873,49.708 cw(c56.487,49.708) R6.2@56.053,50.142 ; 55.329,50.35 ccw(c55.329,50.866) R6.2@55.694,50.501 ; R55.2@55.71,48.527 ccw(c55.317,48.92) 55.873,48.92 ; R55.2@55.873,48.364 R6.2@55.873,50.321 55.845,50.35 55.11,50.35 53.593,51.867 C20.2@51.245,51.867 51.245,52.615 52.043,53.413 ; 55.873,49 ccw(c56.543,49) R55.2@56.07,48.527 ; R55.2@55.89,48.093 cw(c55.89,46.314) 57.148,47.572 ; R55.2@56.043,48.145 cw(c56.307,47.798) 56.614,48.106 ; R55.2@56.099,48.203 cw(c56.373,48.015) 56.373,48.347 ; R55.2@56.099,48.491 ccw(c56.373,48.679) 56.373,48.347 ; 56.408,48.312 ccw(c56.129,48.032) R55.2@55.89,48.347 ; 56.714,48.005 ccw(c55.89,47.181) R55.2@55.89,48.347 ; v1@61.838,76.949 ccw(c61.542,76.654) 61.542,77.071 ccw(c61.542,77.489) v1@61.838,77.194 ; v1(61.96,77.071) 53.05,77.071 52.653,76.675 ; v1(62.06,60.07) XS1.1@72.211,60.07 ; v1@62.182,59.948 cw(c62.478,59.652) 62.478,60.07 cw(c62.478,60.488) v1@62.182,60.192 ; 70.634,60.07 ccw(c70.634,61.833) XS1.1@71.881,60.586 ; 71.001,60.07 cw(c71.001,58.825) 71.881,59.705 cw(c71.043,58.867) 72.228,58.867 ; 71.248,60.07 ccw(c71.248,61.22) XS1.1@72.061,60.407 ; 72.228,58.416 cw(c74.051,58.416) XS1.1@72.762,59.705 ; 72.228,59.03 cw(c73.438,59.03) XS1.1@72.583,59.885 ; 72.239,41.93 72.228,41.93 ; XS1.1@72.322,60.146 72.228,60.053 72.228,41.93 ; R14.2@84.341,22.86 ccw(c83.727,22.86) 84.161,23.294 ccw(c84.595,23.727) R14.2@84.595,23.114 ; R14.2@84.595,22.86 82.935,24.52 72.228,35.226 72.228,41.93 ; 32.311,53.035 R28.1@33.391,51.956 ; R28.1@33.391,51.956 33.841,51.956 ; 33.841,51.956 34.411,52.525 ; 34.411,52.525 35.86,52.525 ; 35.86,52.525 36.096,52.525 C14.2@36.705,51.916 C10.1@38.305,51.916 ; R27.1@37.44,77.102 37.44,79.502 U4.8@40.945,83.007 U4.7@42.215,83.007 42.215,81.325 43.485,80.055 43.485,77.16 ; C10.1@38.305,51.916 38.576,51.916 v1(40.056,53.396) 40.056,55.44 ; 40.056,55.44 R1.2@40.056,56.477 R26.1@41.224,56.477 ; R26.1@41.224,56.477 41.224,56.427 44.238,53.413 52.043,53.413 ; 43.485,77.16 44.065,77.16 46.407,77.16 52.168,77.16 52.653,76.675 ; R55.2@55.89,48.347 56.373,48.347 ; 56.373,48.347 57.32,47.4 57.32,44.12 59.51,41.93 72.228,41.93
  Bottom Layer w0.178: D3.5@85.534,10.467 cw(c85.534,9.474) 86.236,10.176 ; D3.5@85.534,10.644 cw(c85.534,10.081) 85.932,10.479 ; D3.5@85.534,10.822 cw(c85.534,10.688) D3.5@85.629,10.783 ; D3.5@85.534,10.878 86.292,10.12 ; C2.2@86.067,16.52 ccw(c85.569,17.018) 86.274,17.018 ccw(c86.979,17.018) C2.2@86.48,16.52 ; v1@86.141,22.711 cw(c85.819,22.389) 86.274,22.389 ; C2.2@86.274,16.021 cw(c86.274,15.316) 86.773,15.815 cw(c87.271,16.313) C2.2@86.566,16.313 ; 86.274,22.311 cw(c86.839,22.311) v1@86.439,22.711 ; v1@86.29,22.885 v1(86.29,22.86) 86.274,22.844 86.274,20.386 87.08,19.58 87.08,17.854 86.274,17.048 C2.2@86.274,16.313 87.14,15.447 87.14,10.25 87.01,10.12 ; 86.292,10.11 87.01,10.11
  Bottom Layer w0.2: v1@37.371,59.971 ccw(c38.051,60.651) 38.051,59.69 ; 37.568,59.69 cw(c37.568,60.168) v1(37.23,59.83) 37.37,59.69 42.04,59.69 v1(42.38,59.35)
  Bottom Layer w0.254: v1(22.72,32.653) 32.487,32.653 v1@32.59,32.55 ; v1@22.842,32.531 cw(c23.138,32.236) 23.138,32.653 cw(c23.138,33.071) v1@22.842,32.776 ; 32.028,32.653 cw(c32.028,32.088) v1@32.427,32.488 ; 32.236,32.653 ccw(c32.236,32.923) v1@32.427,32.732 ; 39.715,53.024 ccw(c39.539,53.325) v1@39.884,53.372 ; v1@39.883,53.396 cw(c39.465,53.396) 39.76,53.1 cw(c40.056,52.805) v1@40.056,53.223 ; v1@39.928,33.076 ccw(c39.632,33.371) 40.05,33.371 ccw(c40.468,33.371) v1@40.172,33.076 ; v1@39.933,53.273 cw(c39.652,52.992) 40.05,52.992 ; v1(40.05,32.953) 40.05,53.22 39.64,52.98 v1(40.056,53.396) ; 40.05,52.964 cw(c40.487,52.964) v1@40.178,53.273 ; v1(43.91,67.35) 46.356,67.35 v1(47.436,68.43) ; v1@44.032,67.228 cw(c44.328,66.932) 44.328,67.35 cw(c44.328,67.768) v1@44.032,67.472 ; v1@47.263,68.43 cw(c46.846,68.43) 47.141,68.135 cw(c47.436,67.839) v1@47.436,68.257 ; v1@61.838,76.949 cw(c61.542,76.654) 61.96,76.654 cw(c62.378,76.654) v1@62.082,76.949 ; 61.96,60.729 ccw(c62.719,60.729) v1@62.182,60.192 ; v1(61.96,77.071) 61.96,60.17 v1(62.06,60.07)
VDDIO: C33.2 C34.1 D1.5 R22.2 | length 9
  Top Layer w0.178: C33.2@34.832,35.805 34.925,35.805 C33.2@34.925,35.898 34.952,35.925 34.952,36.035 C33.2@35.062,36.035
  Top Layer w0.254: R22.2@34.542,32.833 ccw(c34.109,33.266) 34.722,33.266 ccw(c35.335,33.266) R22.2@34.901,32.833 ; C34.1@34.653,34.576 ccw(c34.219,35.01) 34.832,35.01 ccw(c35.445,35.01) C34.1@35.012,34.576 ; R22.2@34.722,32.653 34.722,34.286 C34.1@34.832,34.396 C33.2@34.832,35.805 ; 34.722,33.517 cw(c35.712,33.517) C34.1@35.012,34.217 ; 34.832,35.367 cw(c35.456,35.367) C33.2@35.015,35.808 ; C33.2@34.835,35.988 ccw(c34.287,36.536) 35.062,36.536 ; C33.2@35.062,36.035 D1.5@35.062,37.587
WSI: U5.57
WSO: U5.40
pads on no net: B1. D3.0 D3.3 D3.4 U5.3 U5.5 U5.6 U5.7 U5.10 U5.14 U5.17 U5.18 U5.19 U5.27 U5.33 U5.35 U5.37 U5.39 U5.46 U5.47 U5.48 U5.49 U5.54 U5.62
copper on no net: | length 17.6
  Top Layer w0.254: 17.169,20.353 ccw(c15.772,20.353) 17.169,20.353
  Bottom Layer w0.254: 17.169,20.353 ccw(c15.772,20.353) 17.169,20.353

## Polygon pours and split planes (outlines as drawn)
GND on Top Layer "Bottom Layer-No Net" (hatched 90Degree grid 0.508 track 0.203, remove dead copper, pour order 1000): 10.17,9.96 11.57,8.56 97.59,8.56 97.59,97.37 98.1,97.88 97.97,97.75 10.56,97.75 10.56,10.09 10.3,9.83
GND on Bottom Layer "Bottom Layer-No Net" (hatched 90Degree grid 0.508 track 0.203, remove dead copper, pour order 1001): 11.44,10.97 13.6,8.81 97.47,8.81 97.47,95.21 97.08,95.6 96.45,96.23 8.53,96.23 8.53,13.88 11.57,10.84

## Keep-outs
Keep-Out Layer:
  circle w0.127: c16.479,15.387 r1.1
  circle w0.127: c16.479,91.048 r1.1
  circle w0.127: c92.141,91.048 r1.1
  circle w0.127: c16.479,15.387 r1.1
  circle w0.127: c16.479,91.048 r1.1
  circle w0.127: c92.141,91.048 r1.1
  circle w0.127: c16.479,15.387 r1.1
  circle w0.127: c16.479,91.048 r1.1
  circle w0.127: c92.141,91.048 r1.1
  lines w0.127: 13.16,14.467 ccw(c15.56,14.468) 15.56,12.067 ; 13.16,91.967 cw(c15.56,91.967) 15.56,94.367 ; 93.06,19.54 ccw(c93.06,21.94) 95.46,21.94 ; 93.06,94.368 cw(c93.06,91.967) 95.46,91.967 ; 93.06,94.368 cw(c93.06,91.967) 95.46,91.967 ; 93.06,94.368 cw(c93.06,91.967) 95.46,91.967
  lines w0.178: 13.16,14.467 13.16,25.311 ; 13.16,25.37 13.16,48.611 13.16,89.05 ; 13.16,89.047 13.16,91.967 ; 15.56,12.067 20.81,12.067 20.81,19.552 ; 15.56,94.367 37.386,94.367 37.386,92.117 39.186,92.117 39.186,94.367 69.434,94.367 69.434,92.117 71.234,92.117 71.234,94.367 ; 20.81,19.547 53.21,19.547 53.21,12.367 72.51,12.367 72.51,17.302 65.48,17.302 ; 62.482,19.552 55.41,19.552 ; 65.478,17.302 65.478,19.54 83.082,19.54 ; 71.234,94.367 93.06,94.367 ; 82.305,13.328 83.082,14.104 ; 82.31,13.328 82.31,9.557 88.03,9.557 88.03,19.54 93.06,19.54 ; 83.052,14.104 83.052,19.54 ; 93.206,39.117 95.456,39.117 ; 93.206,40.917 95.456,40.917 ; 93.21,39.117 93.21,40.917 ; 93.21,67.327 93.21,65.527 95.46,65.527 95.46,52.167 95.46,40.917 ; 93.21,67.332 95.46,67.332 ; 95.46,21.94 95.46,28.97 ; 95.46,28.867 95.46,39.117 ; 95.46,67.367 95.46,89.047 95.46,91.967 ; 55.41,19.552 63.278,19.552 ; 55.41,19.552 63.278,19.552 ; 55.41,19.552 55.41,17.254 63.278,17.254 63.278,19.552 ; 84.25,17.787 84.25,19.54 86.511,19.54 86.511,17.787 84.25,17.787

## Silkscreen, mask and mechanical layers (free items; w line width, h text height)
Top Overlay:
  drawing of 208 lines, arcs and shapes, not listed
  text "P-TK-05-2FC-LPC54114" at 90.398,83.167 h1.5 r270
  text "SCL" at 18.21,45.466 h0.76
  text "SDA" at 18.21,42.78 h0.76
  text "GND" at 18.21,40.1 h0.76
  text "VDD" at 18.21,37.846 h0.76
Bottom Overlay:
  lines w0.178: 89.21,34.803 90.21,34.803 90.21,87.303 89.21,87.303 ; 19.41,32.653 89.21,32.653 ; 19.41,32.653 19.41,89.453 ; 19.41,32.653 89.21,32.653 ; 19.41,32.653 19.41,89.453 ; 19.41,89.453 89.21,89.453 ; 19.41,89.453 89.21,89.453 ; 20.01,36.803 20.01,86.203 ; 20.01,36.803 87.21,36.803 87.21,86.203 20.01,86.203 ; 20.01,36.803 14.01,38.503 14.01,84.503 20.01,86.203 ; 89.21,32.653 89.21,89.453 ; 89.21,32.653 89.21,89.453 ; 14.76,56.553 15.96,56.553 15.96,58.453 14.76,58.453 14.76,56.553 ; 14.76,64.553 15.96,64.553 15.96,66.453 14.76,66.453 14.76,64.553 ; 15.01,56.803 15.71,56.803 15.71,58.203 15.01,58.203 15.01,56.803 ; 15.01,64.803 15.71,64.803 15.71,66.203 15.01,66.203 15.01,64.803

## Text inside footprints (layer, text, board x,y; h text height)
B1: Top Overlay "+" at 67.41,39.479 h0.76 r90
HL2: Bottom Overlay "A" at 13.849,65.339 h0.76; Bottom Overlay "K" at 13.849,57.211 h0.76
XS2: Bottom Overlay "10" at 64.498,89.217 h0.76 r180; Bottom Overlay "17" at 42.148,89.217 h0.76 r180; Bottom Overlay "1" at 66.048,34.417 h0.76 r180; Bottom Overlay "9" at 41.848,34.217 h0.76 r180